# EAGLE board MotherBoard (EAGLE 6.4)
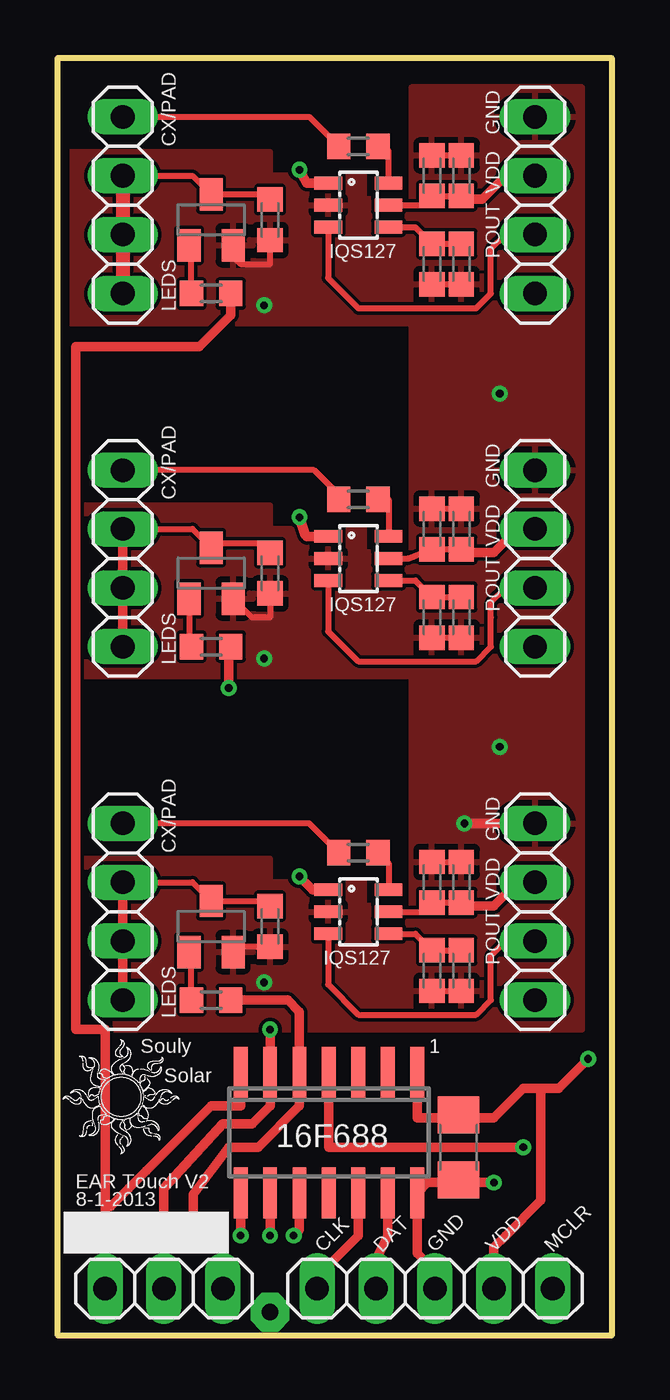
[diagram p0: board, top side]
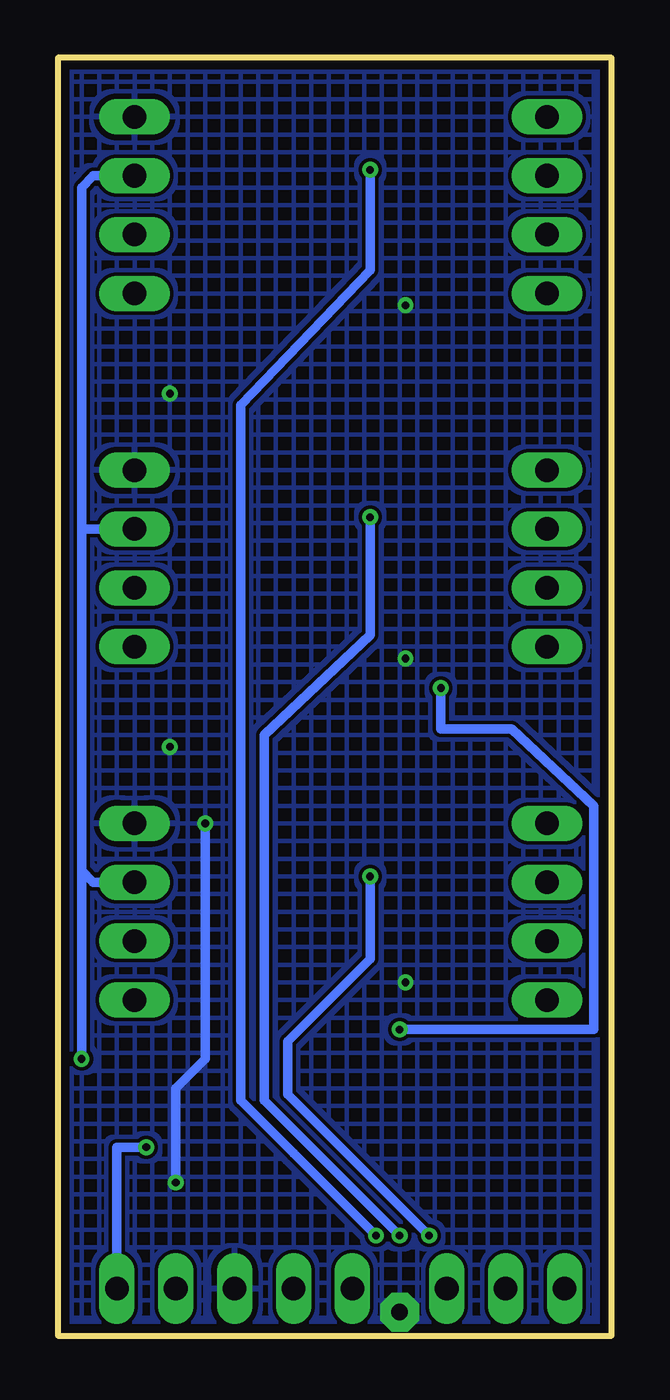
[diagram p1: board, bottom side, seen from below]

Size 23.88 x 55.12 mm. Coordinates in mm from the lower left corner, seen from the top.
Outline: 0,0 0,55.12 23.88,55.12 23.88,0 0,0
Copper layers (1*16): Top 0.0356mm / dielectric 1.5011mm / Bottom 0.0356mm
Design rules "LaenPCBOrder *": minimum track width 6mil, minimum drill 13mil, track to track 6mil, track to pad 6mil, pad to pad 6mil, via to via 6mil, smd to smd 6mil, copper to edge 15mil, drill to drill 6mil, minimum pad ring 7mil, minimum via ring 7mil, stop-mask expansion 4mil, vias tented up to drill 25mil, thermal gap 10mil

## Footprints (pad centres in the part's own frame; a part is rotated, then mirrored left to right if it is on the bottom)
C0603K = smd 1.05 x 1.08: 1 -0.875,0; 2 0.875,0
C1206 = smd 1.6 x 1.8: 1 -1.4,0; 2 1.4,0
1X04 = drill 1.016 long: 1 -3.81,0; 2 -1.27,0; 3 1.27,0; 4 3.81,0
1X05 = drill 1.016 long: 1 -5.08,0; 2 -2.54,0; 3 0,0; 4 2.54,0; 5 5.08,0
1X03 = drill 1.016 long: 1 -2.54,0; 2 0,0; 3 2.54,0
R0603 = smd 1 x 1.1: 1 -0.85,0; 2 0.85,0
SOT23-BEC = smd 1 x 1.4: B -0.95,-1.1; C 0,1.1; E 0.95,-1.1
SOT23-6 = smd 0.55 x 1.2: 1 -0.95,-1.3; 2 0,-1.3; 3 0.95,-1.3; 4 0.95,1.3; 5 0,1.3; 6 -0.95,1.3
SOIC14 = smd 0.6 x 2.2: 1 -3.81,-2.6; 2 -2.54,-2.6; 3 -1.27,-2.6; 4 0,-2.6; 5 1.27,-2.6; 6 2.54,-2.6; 7 3.81,-2.6; 8 3.81,2.6; 9 2.54,2.6; 10 1.27,2.6; 11 0,2.6; 12 -1.27,2.6; 13 -2.54,2.6; 14 -3.81,2.6

## Placement (x,y rotation side)
C1  100pF  [C0603K]  16.13,19.56 90 top
C2  1uF  [C0603K]  17.4,19.56 90 top
C3  100pF  [C0603K]  17.4,15.75 270 top
C4  1uF  [C0603K]  16.13,15.75 270 top
C5  100pF  [C0603K]  16.13,34.8 90 top
C6  1uF  [C0603K]  17.4,34.8 90 top
C7  100pF  [C0603K]  16.13,30.99 270 top
C8  1uF  [C0603K]  17.4,30.99 270 top
C9  100pF  [C0603K]  16.13,50.04 90 top
C10  1uF  [C0603K]  17.4,50.04 90 top
C11  100pF  [C0603K]  17.4,46.23 270 top
C12  1uF  [C0603K]  16.13,46.23 270 top
C13  1uF  [C0603K]  9.14,17.65 270 top
C14  1uF  [C0603K]  9.14,32.89 270 top
C15  1uF  [C0603K]  9.14,48.13 270 top
C16  [C1206]  17.27,8.13 270 top
JP1  [1X04]  20.57,33.53 90 top
JP2  [1X04]  2.79,33.53 90 top
JP3  [1X04]  20.57,18.29 90 top
JP4  [1X04]  2.79,18.29 90 top
JP5  [1X04]  20.57,48.77 90 top
JP6  [1X04]  2.79,48.77 90 top
JP7  [1X05]  16.26,2.03 180 top
JP8  [1X03]  4.57,2.03 180 top
R1  470R  [R0603]  12.95,36.07 0 top
R2  470R  [R0603]  12.95,51.31 0 top
R3  1K  [R0603]  6.6,14.48 0 top
R4  470R  [R0603]  12.95,20.83 0 top
R5  1K  [R0603]  6.6,29.72 0 top
R6  1K  [R0603]  6.6,44.96 0 top
T1  [SOT23-BEC]  6.6,17.65 0 top
T2  [SOT23-BEC]  6.6,32.89 0 top
T3  [SOT23-BEC]  6.6,48.13 0 top
U1  [SOT23-6]  12.95,18.29 270 top
U2  [SOT23-6]  12.95,33.53 270 top
U3  [SOT23-6]  12.95,48.77 270 top
U$1  [SOIC14]  11.68,8.76 180 top
U$2  [SOULY-LOGO]  0,7.62 0 top

## Library data of the parts
C1-C16 R1-R6 = adafruit
JP1-JP8 = pinhead
T1-T3 = transistor
U1-U3 U$2 = soulysolar
U$1 = microchip-16f688

## Nets
CLOCK: JP7.5 U$1.12
DATA: JP7.4 U$1.13
GND: C1.2 C2.2 C3.2 C4.2 C5.2 C6.2 C7.2 C8.2 C9.2 C10.2 C11.2 C12.2 C13.2 C14.2 C15.2 C16.2 JP1.4 JP3.4 JP5.4 JP7.3 T1.E T2.E T3.E U1.2 U2.2 U3.2 U$1.14
LED0: JP8.1 R3.2 U$1.5
LED1: JP8.2 R5.2 U$1.6
LED2: JP8.3 R6.2 U$1.7
MCLR: JP7.1 U$1.4
N$1: C7.1 C8.1 U2.4
N$2: R1.2 U2.6
N$3: C3.1 C4.1 U1.4
N$4: C13.1 JP4.1 JP4.2 JP4.3 T1.C
N$5: C14.1 JP2.1 JP2.2 JP2.3 T2.C
N$6: C15.1 JP6.1 JP6.2 JP6.3 T3.C
N$7: C11.1 C12.1 U3.4
N$8: R4.2 U1.6
N$9: R3.1 T1.B
N$10: R5.1 T2.B
N$11: R6.1 T3.B
N$12: R2.2 U3.6
POUT1: JP3.2 U1.3
POUT2: JP1.2 U2.3
POUT3: JP5.2 U3.3
TOUCHPAD1: JP4.4 R4.1
TOUCHPAD2: JP2.4 R1.1
TOUCHPAD3: JP6.4 R2.1
TOUT1: U1.1 U$1.8
TOUT2: U2.1 U$1.9
TOUT3: U3.1 U$1.10
VDDHI: C1.1 C2.1 C5.1 C6.1 C9.1 C10.1 C16.1 JP1.3 JP3.3 JP5.3 JP7.2 U1.5 U2.5 U3.5 U$1.1

## Tracks (layer width: path | path; a pad name or v marks a point on that pad's centre or on a via)
CLOCK
  Top 0.406: JP7.5 11.18,2.54 12.95,4.32 12.95,4.95 U$1.12
DATA
  Top 0.406: JP7.4 13.72,3.3 14.22,4.32 U$1.13
GND  (via drill 0.33 pad 0.25, 0.7 pad 1.68)
  Top 0.254: T3.E 7.55,46.55 7.87,46.23 9.14,46.23 C15.2 | C12.2 C11.2 | C9.2 C10.2 | C5.2 C6.2 | C7.2 C8.2 | C14.2 9.14,30.99 8.36,30.99 T2.E | C4.2 C3.2 | C1.2 C2.2 | C13.2 7.78,16.78 T1.E
  Top 0.406: JP3.4 v17.53,22.1 | v18.8,6.6 17.27,6.6 | 17.27,6.6 15.94,6.6 U$1.14 15.49,4.33 | 15.49,4.32 15.49,3.56 16.26,2.79 JP7.3 | C16.2 17.27,6.6
  Bottom 0.406: v17.53,22.1 17.53,11.94 18.8,10.67 v18.8,6.6
  other vias: 19.05,40.64 19.05,25.4 8.89,29.21 8.89,15.24 8.89,44.45 9.14,1.02
  pour Top: 22.61,53.85 15.24,53.85 15.24,49.02 13.21,49.02 13.21,50.04 9.14,50.04 9.14,51.05 0.51,51.05 0.51,43.69 22.61,43.69
  pour Top: 22.61,43.69 15.24,43.69 15.24,33.78 13.21,33.78 13.21,34.8 9.14,34.8 9.14,35.81 0.51,35.81 0.51,28.45 22.61,28.45
  pour Top: 22.61,28.45 15.24,28.45 15.24,18.54 13.21,18.54 13.21,19.56 9.14,19.56 9.14,20.57 0.51,20.57 0.51,13.21 22.61,13.21
  pour Bottom (hatched): 0,55.12 23.88,55.12 23.88,0 0,0
LED0
  Top 0.406: JP8.1 7.11,3.56 5.84,4.83 5.84,6.1 7.37,8.13 8.64,8.13 10.41,9.91 U$1.5 10.41,13.97 9.91,14.48 R3.2
LED1  (via drill 0.33 pad 0.25)
  Top 0.406: v9.14,13.21 U$1.6 9.14,9.91 8.38,9.14 7.11,9.14 4.57,6.35 JP8.2 | v7.37,27.94 7.37,29.63 R5.2
  Bottom 0.406: v9.14,13.21 0.76,13.21 0.76,22.86 4.32,26.16 7.37,26.16 7.37,26.92 v7.37,27.94
LED2
  Top 0.406: R6.2 7.45,44.03 6.1,42.67 0.76,42.67 0.76,13.21 2.03,13.21 2.03,5.59 | U$1.7 7.87,9.91 7.37,9.91 6.6,9.91 3.81,7.11 3.05,6.35 2.29,5.59 2.03,5.59 | JP8.3 2.03,5.59
MCLR  (via drill 0.33 pad 0.25)
  Top 0.406: U$1.4 11.68,8.64 11.68,8.13 v20.07,8.13
  Bottom 0.406: v20.07,8.13 21.34,8.13 21.34,3.56 JP7.1
N$1
  Top 0.254: C8.1 C7.1 15.41,32.58 U2.4
N$2
  Top 0.254: R1.2 14.25,36.07 U2.6
N$3
  Top 0.254: C3.1 C4.1 15.41,17.34 U1.4
N$4
  Top 0.254: JP4.3 5.8,19.56 T1.C 8.92,18.75 C13.1
  Top 0.406: JP4.2 JP4.3 JP4.1
N$5
  Top 0.254: C14.1 9.14,34.16 7.07,34.16 T2.C 5.8,34.8 JP2.3
  Top 0.406: JP2.3 JP2.2 JP2.1
N$6
  Top 0.254: C15.1 8.92,49.23 T3.C 5.8,50.04 JP6.3
  Top 0.61: JP6.3 JP6.2 JP6.1
N$7
  Top 0.254: U3.4 15.41,47.82 C12.1 C11.1
N$8
  Top 0.254: R4.2 14.25,20.38 U1.6
N$9
  Top 0.254: R3.1 5.75,16.45 T1.B
N$10
  Top 0.254: T2.B 5.65,29.82 R5.1
N$11
  Top 0.254: 5.33,46.71 T3.B 5.75,46.93 R6.1
N$12
  Top 0.254: U3.6 14.25,51.11 R2.2
POUT1
  Top 0.254: U1.3 11.65,15.14 12.95,13.84 18.03,13.84 18.67,14.48 18.67,16.38 19.3,17.02 JP3.2
POUT2
  Top 0.254: U2.3 11.65,30.38 12.95,29.08 18.03,29.08 18.67,29.72 18.67,30.99 18.67,31.62 19.3,32.26 JP1.2
POUT3
  Top 0.254: U3.3 11.65,45.62 12.95,44.32 18.03,44.32 18.67,44.96 18.67,46.86 19.3,47.5 JP5.2
TOUCHPAD1
  Top 0.254: R4.1 10.83,22.1 JP4.4
TOUCHPAD2
  Top 0.254: R1.1 12.1,36.28 11.05,37.34 JP2.4
TOUCHPAD3
  Top 0.254: JP6.4 10.83,52.58 R2.1
TOUT1  (via drill 0.33 pad 0.25)
  Top 0.406: U1.1 10.99,19.24 v10.41,19.81 | v7.87,4.32 U$1.8
  Bottom 0.406: v10.41,19.81 10.41,16.26 13.97,12.7 13.97,10.41 v7.87,4.32
TOUT2  (via drill 0.33 pad 0.25)
  Top 0.406: U2.1 11.5,34.48 10.73,34.48 10.67,34.54 v10.41,35.31 | v9.14,4.32 U$1.9
  Bottom 0.406: v10.41,35.31 10.41,30.23 14.99,25.91 14.99,10.16 v9.14,4.32
TOUT3  (via drill 0.33 pad 0.25)
  Top 0.406: U3.1 10.73,49.72 v10.41,50.29 | v10.16,4.32 10.41,4.57 U$1.10
  Bottom 0.406: v10.41,50.29 10.41,45.97 16,40.13 16,10.16 13.72,7.87 v10.16,4.32
VDDHI  (via drill 0.33 pad 0.25)
  Top 0.254: U3.5 15.73,48.77 C9.1 C10.1 | U2.5 15.1,33.53 C5.1 C6.1 | C2.1 C1.1 15.73,18.29 U1.5
  Top 0.406: 17.27,9.4 18.8,9.4 20.07,10.67 20.83,10.67 | 17.27,9.4 16.76,9.4 15.49,9.4 U$1.1 | JP5.3 19.3,50.04 18.29,49.02 17.54,49.02 C10.1 | JP1.3 19.81,34.8 18.8,33.78 17.54,33.78 C6.1 | C2.1 17.54,18.54 18.8,18.54 19.81,19.56 JP3.3 | v22.86,11.94 21.59,10.67 20.83,10.67 | 20.83,10.67 20.83,5.84 19.3,4.32 18.8,3.81 JP7.2 | C16.1 17.27,9.4
  Bottom 0.406: JP1.3 22.35,34.8 22.86,34.8 | 22.86,34.8 22.86,49.53 22.35,50.04 JP5.3 | 22.86,20.07 22.35,19.56 JP3.3 | 22.86,20.07 22.86,34.8 | v22.86,11.94 22.86,20.07

## Text on the board
tPlace: GND | CX/PAD | VDD | IQS127 | POUT | LEDS | GND | CX/PAD | VDD | IQS127 | POUT | LEDS | CX/PAD | GND | VDD | IQS127 | POUT | LEDS | Souly | 1 | Solar | 16F688 | 8-1-2013 | EAR Touch V2 | CLK | DAT | GND | VDD | MCLR